# Altium PCB PCB_PCB_OPM MegaMod v0.3_2023-09-30.pcbdoc
Units mm, origin at the board's own origin, x right, y up, seen from the top; angles counter-clockwise.
Board outline 68.2 x 65.53 mm, 2 copper layers (Top Layer, Bottom Layer); 41 components, 52 nets, 176 pads, 16 vias.
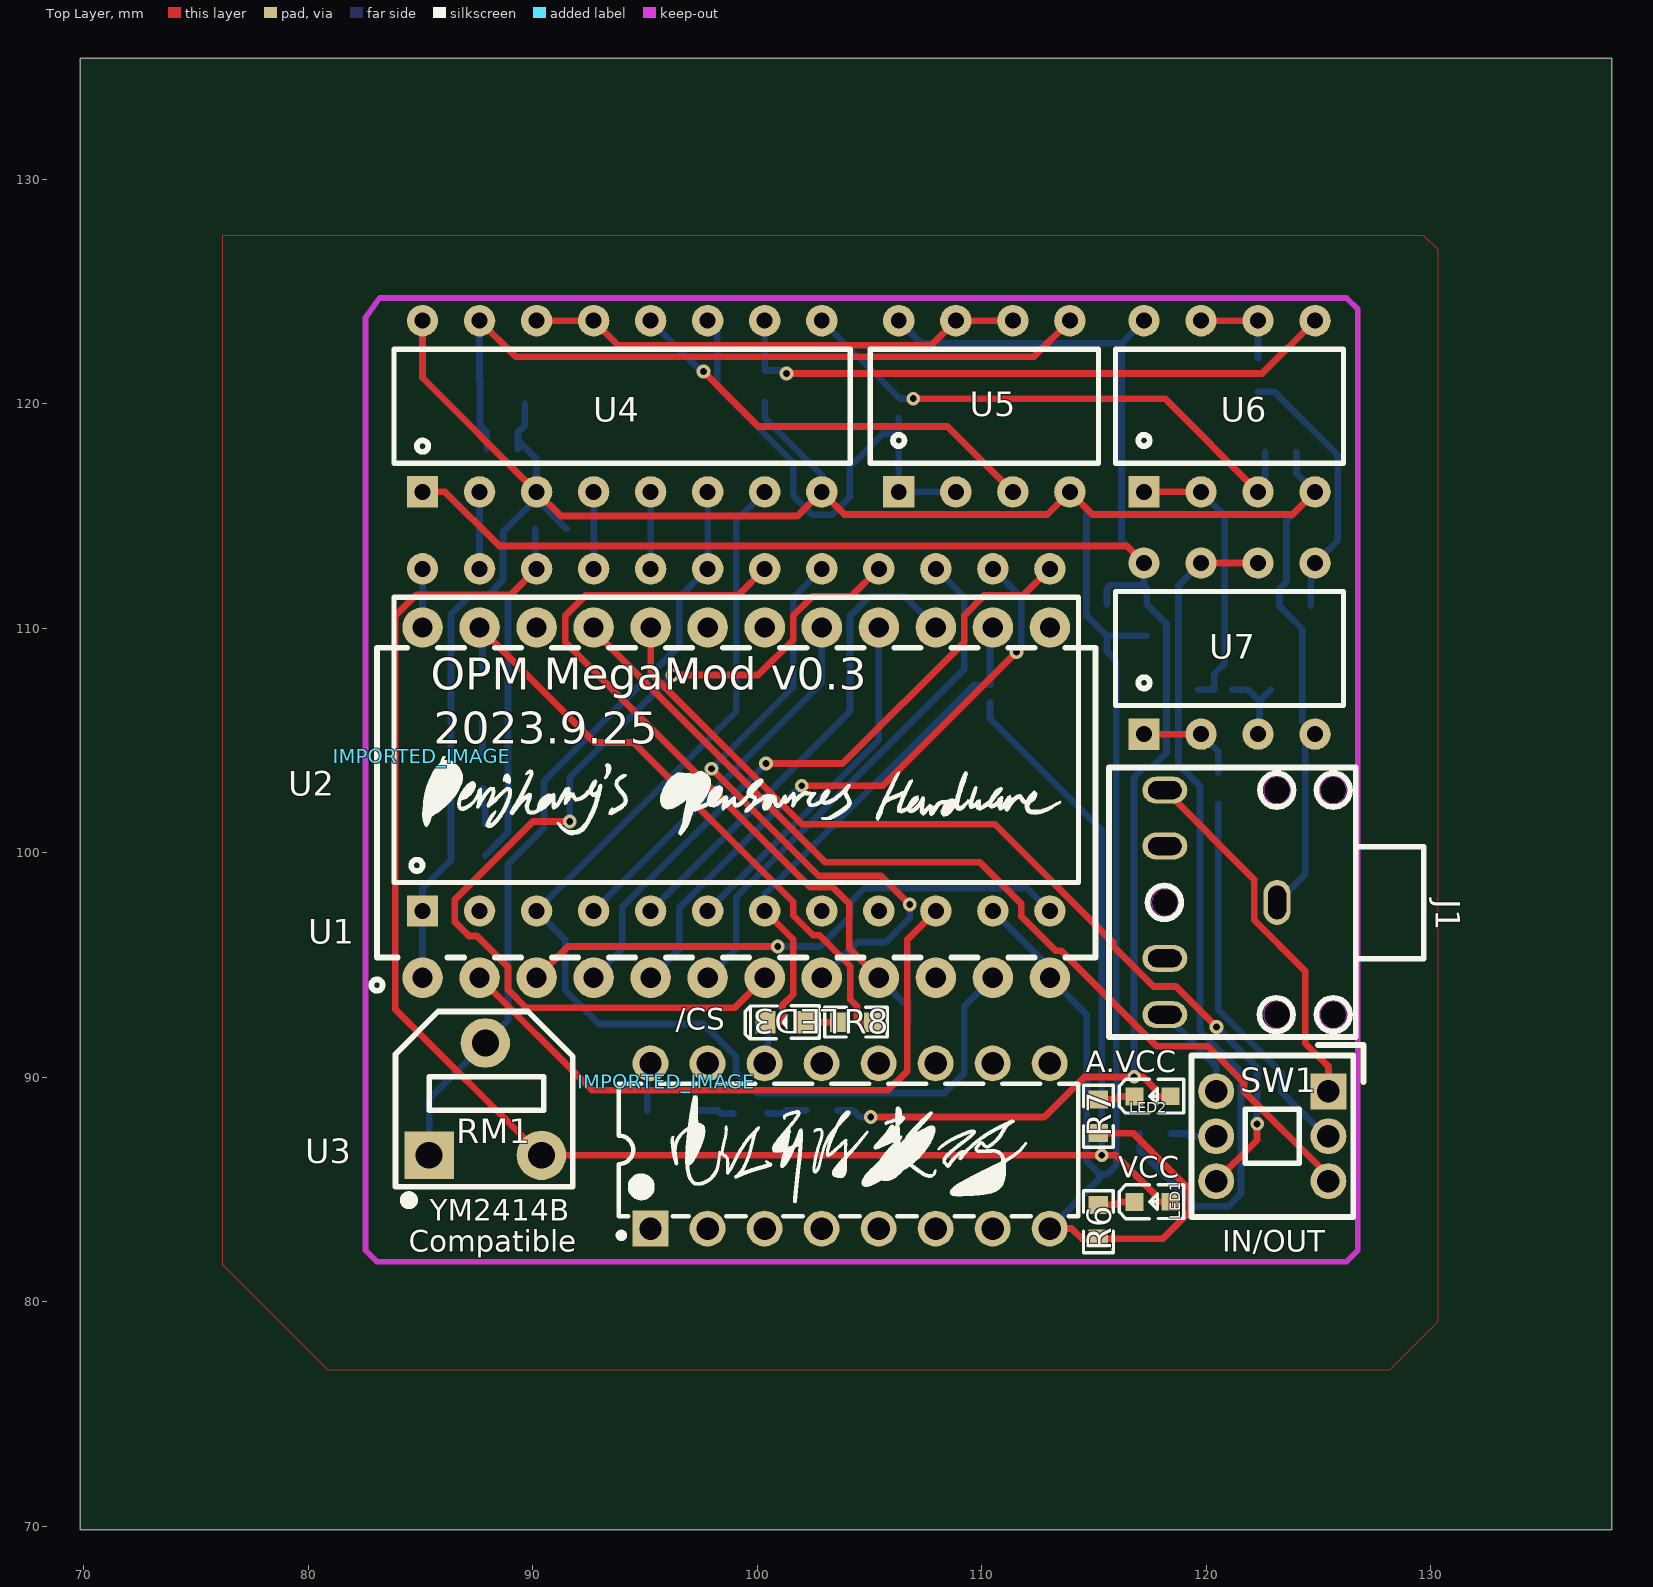
[diagram p0: Top Layer view]
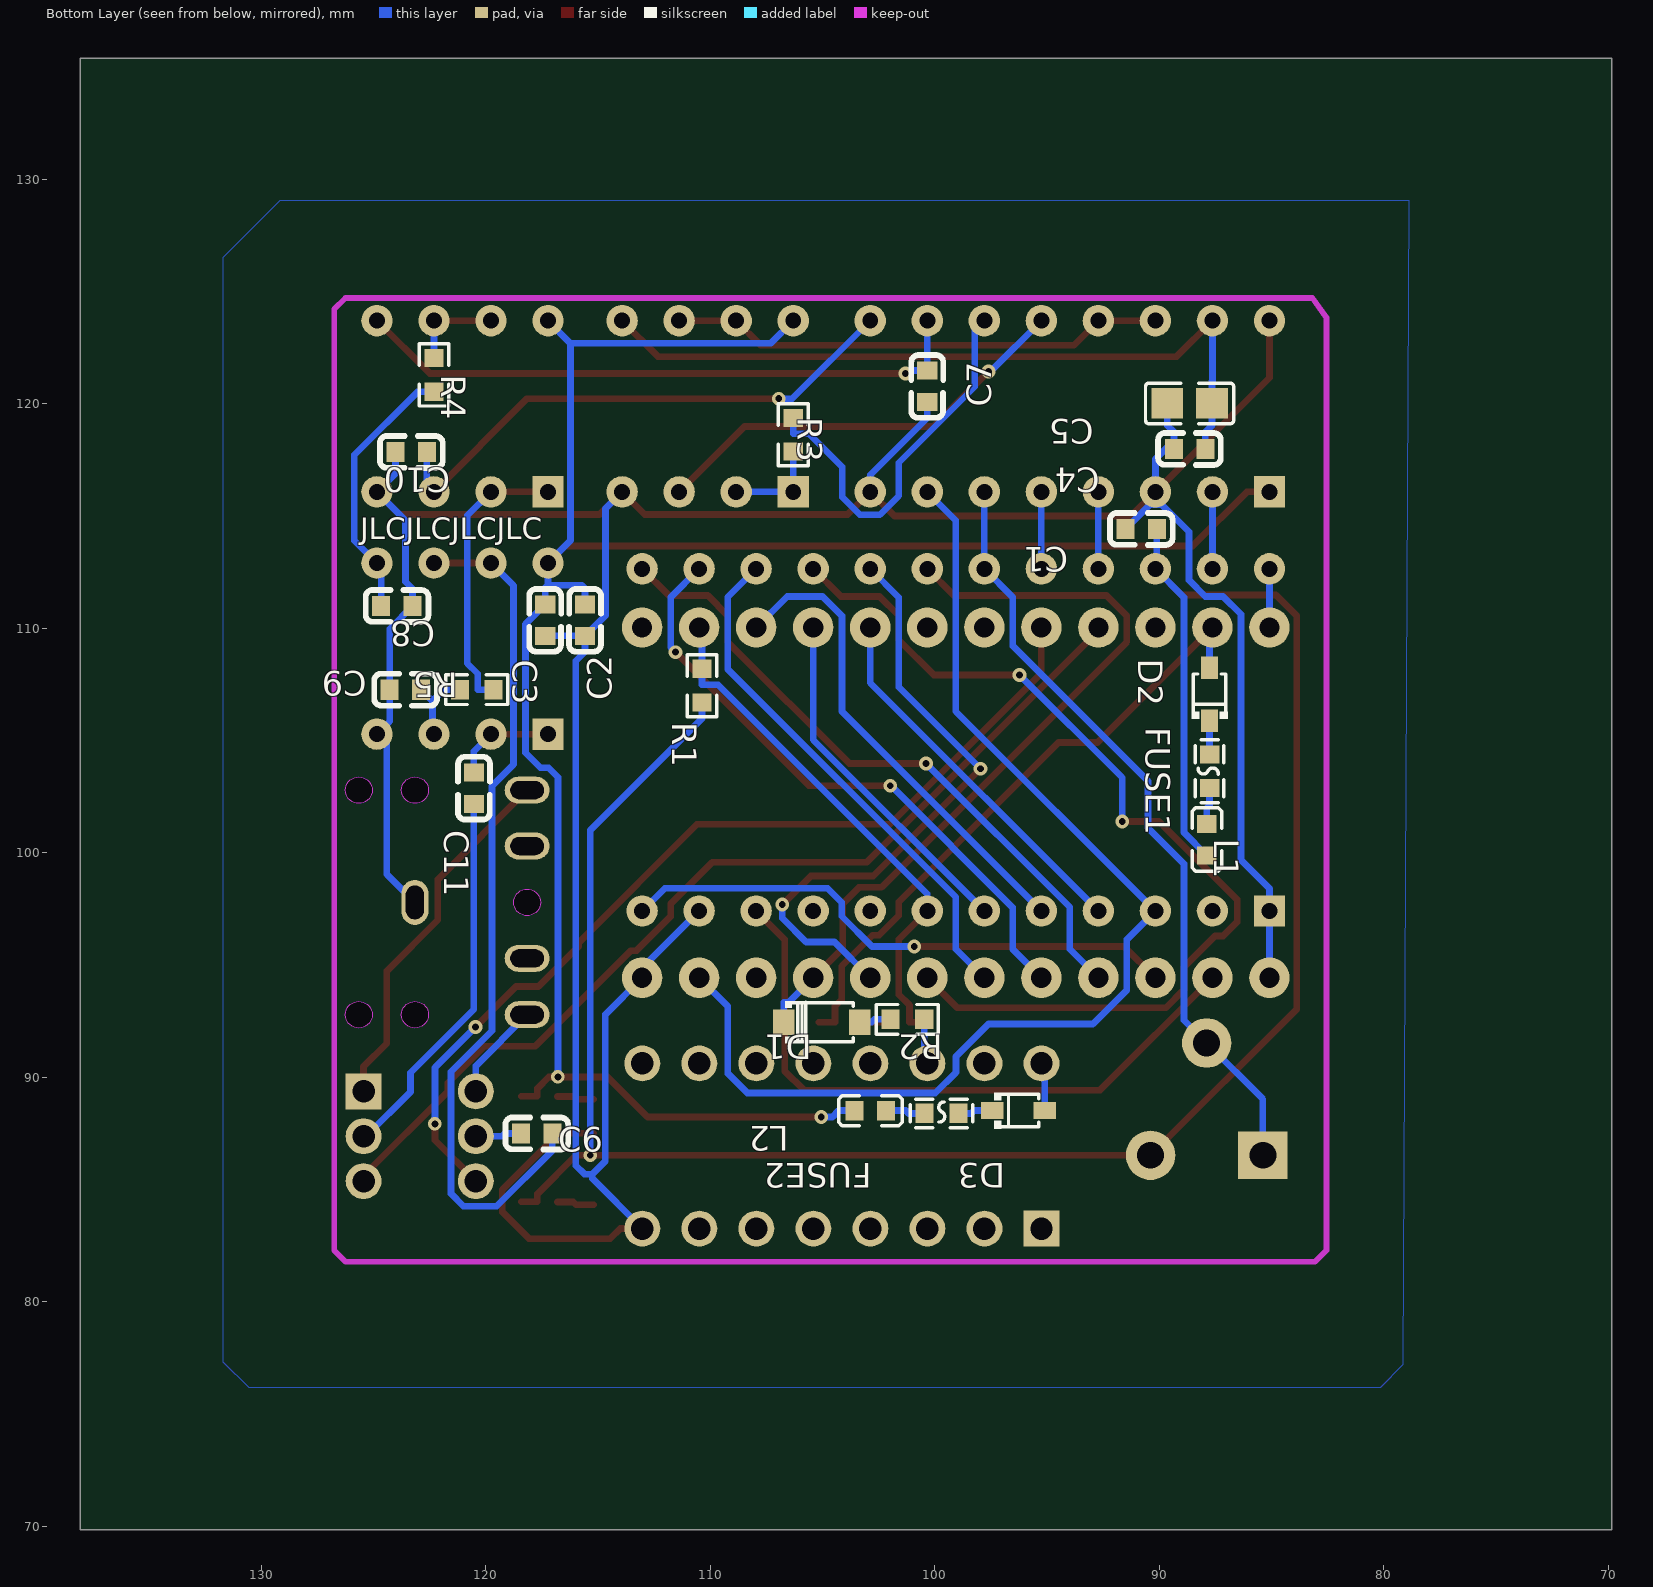
[diagram p1: Bottom Layer view, seen from below]

## Layer stack, top to bottom
Top Layer: signal copper (thickness not stored)
Dielectric: dielectric 0.32, FR-4, Dk 4.8
Bottom Layer: signal copper (thickness not stored)

## Board outline
138.049,69.85 69.85,69.85 69.85,135.382 138.049,135.382

## Components (designator, comment, footprint, x,y, rotation, side; value= is the part's Value field where it differs from the comment)
C1 "0.1u" C0603 90.805,114.427 r0 bottom
C2 "0.1u" C0603 115.57,110.363 r90 bottom
C3 "0.1u" C0603 117.348,110.363 r90 bottom
C4 "0.1u" C0603 88.646,117.983 r180 bottom
C5 "20u" C0805 88.646,120.015 r0 bottom
C6 "4.7u" C0603 117.729,87.503 r0 bottom
C7 "1.8n" C0603 100.33,120.777 r90 bottom
C8 "10n" C0603 123.952,110.998 r0 bottom
C9 "10n" C0603 123.571,107.264 r0 bottom
C10 "1.8n" C0603 123.317,117.856 r0 bottom
C11 "4.7u" C0603 120.523,102.87 r270 bottom
D1 "1N4148W" SOD-123_L2.8-W1.8-LS3.7-RD 105.029,92.456 r180 bottom
D2 "1N5819WS" SOD-323_L1.8-W1.3-LS2.5-RD 87.757,107.061 r90 bottom
D3 "1N5819WS" SOD-323_L1.8-W1.3-LS2.5-RD 96.266,88.519 r180 bottom
FUSE1 "PPTC0.5A/24V 自恢复保险丝-0603" F0603 87.757,103.632 r270 bottom
FUSE2 "PPTC0.5A/24V 自恢复保险丝-0603" F0603 99.695,88.392 r0 bottom
IMPORTED_IMAGE "IMPORTED_IMAGE" IMPORTED_IMAGE 95.974,89.794 r0 top
IMPORTED_IMAGE "IMPORTED_IMAGE" IMPORTED_IMAGE 85.085,104.295 r0 top
J1 "PJ-307C" AUDIO-TH_PJ307C 120.65,97.79 r270 top
L1 "100Ω" L0603 87.884,100.584 r270 bottom
L2 "100Ω" L0603 102.87,88.519 r0 bottom
LED1 "LED0603" LED0603-RD 117.602,84.455 r0 top
LED2 "LED0603" LED0603-RD 117.602,89.154 r0 top
LED3 "LED-0603_R" LED0603_RED 101.219,92.456 r180 top
R1 "62k" R0603 110.363,107.442 r270 bottom
R2 "1k" R0603 101.219,92.583 r0 bottom
R3 "100" R0603 106.299,118.618 r270 bottom
R4 "3.6k" R0603 122.301,121.285 r270 bottom
R5 "3.6k" R0603 120.396,107.264 r0 bottom
R6 "20k" R0603 115.189,83.566 r270 top
R7 "20k" R0603 115.189,88.265 r270 top
R8 "100r" R0603 104.394,92.456 r180 top
RM1 "5K" RES-ADJ-SMD_RM065-V1 87.884,89.027 r0 top
SW1 "XKB7070-Z" SW-TH_6P-L7.0-W7.0-P2.00 122.936,87.376 r0 top
U1 "YM2151" DIP24-600 99.06,105.029 r0 top
U2 "MegaGRRL IC-FM" DIP-24_L32.0-W13.8-P2.54-LS15.6-BL 99.06,102.235 r0 top
U3 "MegaGRRL IC-DCSG" DIP-16_L20.4-W5.8-P2.54-LS7.6-BL 104.132,86.941 r0 top
U4 "YM3012" DIP16 93.98,119.888 r0 top
U5 "SA5532AP" DIP8 110.109,119.888 r0 top
U6 "SA5532AP" DIP8 121.031,119.888 r0 top
U7 "SA5532AP" DIP8 121.031,109.093 r0 top

## Footprints (in the part's own frame and the unit in brackets; to place one, negate y for a bottom-side part, rotate by r counter-clockwise, add the part's x,y. Pads: shape width x height; smd on the part's side, far side on the other; paste and mask are expansions set on the pad)
AUDIO-TH_PJ307C [mm]
  oval 2x1.2 hole 0.8 slot 1.5 at 0 deg: 1(0,2.5)
  oval 1.2x2 hole 0.8 slot 1.5 at 90 deg: 2(5,-2.5) 3(2.489,-2.5) 4(-2.511,-2.5) 5(-5,-2.5)
  Multi-Layer board cut-out: -5,5.6 -5.298,5.518 -5.515,5.299 -5.595,5 -5.515,4.702 -5.298,4.483 -5,4.4 -5,4.4 -4.702,4.483 -4.485,4.702 -4.406,5 -4.485,5.299 -4.702,5.518 -5,5.6
  Multi-Layer board cut-out: 5,5.6 4.702,5.518 4.485,5.299 4.405,5 4.485,4.702 4.702,4.483 5,4.4 5,4.4 5.298,4.483 5.515,4.702 5.594,5 5.515,5.299 5.298,5.518 5,5.6
  Multi-Layer board cut-out: 5,3.1 4.702,3.018 4.485,2.799 4.405,2.5 4.485,2.202 4.702,1.982 5,1.9 5,1.9 5.298,1.983 5.515,2.202 5.594,2.5 5.515,2.799 5.298,3.018 5,3.1
  Multi-Layer board cut-out: -5,3.1 -5.298,3.018 -5.515,2.799 -5.595,2.5 -5.515,2.202 -5.298,1.982 -5,1.9 -5,1.9 -4.702,1.983 -4.485,2.202 -4.406,2.5 -4.485,2.799 -4.702,3.018 -5,3.1
  Multi-Layer board cut-out: 0,-1.9 -0.298,-1.982 -0.515,-2.201 -0.595,-2.5 -0.515,-2.798 -0.298,-3.018 0,-3.1 0,-3.1 0.298,-3.017 0.515,-2.798 0.594,-2.5 0.515,-2.201 0.298,-1.982 0,-1.9
  Multi-Layer keep-out region: -5,5.6 -5.298,5.518 -5.515,5.299 -5.595,5 -5.515,4.702 -5.298,4.483 -5,4.4 -5,4.4 -4.702,4.483 -4.485,4.702 -4.406,5 -4.485,5.299 -4.702,5.518 -5,5.6
  Multi-Layer keep-out region: 5,5.6 4.702,5.518 4.485,5.299 4.405,5 4.485,4.702 4.702,4.483 5,4.4 5,4.4 5.298,4.483 5.515,4.702 5.594,5 5.515,5.299 5.298,5.518 5,5.6
  Multi-Layer keep-out region: 5,3.1 4.702,3.018 4.485,2.799 4.405,2.5 4.485,2.202 4.702,1.982 5,1.9 5,1.9 5.298,1.983 5.515,2.202 5.594,2.5 5.515,2.799 5.298,3.018 5,3.1
  Multi-Layer keep-out region: -5,3.1 -5.298,3.018 -5.515,2.799 -5.595,2.5 -5.515,2.202 -5.298,1.982 -5,1.9 -5,1.9 -4.702,1.983 -4.485,2.202 -4.406,2.5 -4.485,2.799 -4.702,3.018 -5,3.1
  Multi-Layer keep-out region: 0,-1.9 -0.298,-1.982 -0.515,-2.201 -0.595,-2.5 -0.515,-2.798 -0.298,-3.018 0,-3.1 0,-3.1 0.298,-3.017 0.515,-2.798 0.594,-2.5 0.515,-2.201 0.298,-1.982 0,-1.9
  silkscreen extent -6.01,-4.99 5.99,9.03
C0603 [mm]
  rect 0.8x0.9 smd: 1(-0.7,0) 2(0.7,0)
  silkscreen extent -1.41,-0.71 1.39,0.72
C0805 [mm]
  rect 1.41x1.35 smd: 1(-1,0) 2(1,0)
  silkscreen extent -1.96,-0.9 1.96,0.9
DIP8 [mil]
  rect 55x55 hole 28: 1(-149.99,-150.01)
  round 55 hole 28: 2(-49.99,-150.01) 3(50.01,-150.01) 4(150.01,-150.01) 5(150.01,149.99) 6(50.01,149.99) 7(-49.99,149.99) 8(-149.99,149.99)
  silkscreen extent -200,-100 200,100
DIP16 [mil]
  rect 55x55 hole 28: 1(-350,-149.99)
  round 55 hole 28: 2(-250,-149.99) 3(-150,-149.99) 4(-50,-149.99) 5(50,-149.99) 6(150,-149.99) 7(250,-149.99) 8(350,-149.99) 9(350,150.01) 10(250,150.01) 11(150,150.01) 12(50,150.01) 13(-50,150.01) 14(-150,150.01) 15(-250,150.01) 16(-350,150.01)
  silkscreen extent -400,-100 400,100
DIP24-600 [mil]
  rect 55x55 hole 28: 1(-550,-300)
  round 55 hole 28: 2(-450,-300) 3(-350,-300) 4(-250,-300) 5(-150,-300) 6(-50,-300) 7(50,-300) 8(150,-300) 9(250,-300) 10(350,-300) 11(450,-300) 12(550,-300) 13(550,300) 14(450,300) 15(350,300) 16(250,300) 17(150,300) 18(50,300) 19(-50,300) 20(-150,300) 21(-250,300) 22(-350,300) 23(-450,300) 24(-550,300)
  silkscreen extent -600,-250 600,250
DIP-16_L20.4-W5.8-P2.54-LS7.6-BL [mm]
  rect 1.6x1.6 hole 1: 1(-8.89,-3.68)
  round 1.6 hole 1: 2(-6.35,-3.68) 3(-3.81,-3.68) 4(-1.27,-3.68) 5(1.27,-3.68) 6(3.81,-3.68) 7(6.35,-3.68) 8(8.89,-3.68) 9(8.89,3.68) 10(6.35,3.68) 11(3.81,3.68) 12(1.27,3.68) 13(-1.27,3.68) 14(-3.81,3.68) 15(-6.35,3.68) 16(-8.89,3.68)
  silkscreen extent -10.31,-4.1 10.16,2.77
DIP-24_L32.0-W13.8-P2.54-LS15.6-BL [mm]
  round 1.8 hole 0.9: 1(-13.97,-7.8) 2(-11.43,-7.8) 3(-8.89,-7.8) 4(-6.35,-7.8) 5(-3.81,-7.8) 6(-1.27,-7.8) 7(1.27,-7.8) 8(3.81,-7.8) 9(6.35,-7.8) 10(8.89,-7.8) 11(11.43,-7.8) 12(13.97,-7.8) 13(13.97,7.8) 14(11.43,7.8) 15(8.89,7.8) 16(6.35,7.8) 17(3.81,7.8) 18(1.27,7.8) 19(-1.27,7.8) 20(-3.81,7.8) 21(-6.35,7.8) 22(-8.89,7.8) 23(-11.43,7.8) 24(-13.97,7.8)
  silkscreen extent -16.26,-8.38 16,6.9
F0603 [mm]
  rect 0.806x0.864 smd: 1(-0.753,0) 2(0.753,0)
  silkscreen extent -1.4,-0.64 1.4,0.64
IMPORTED_IMAGE [mm]
  silkscreen extent 0,-5.4 16.31,0
L0603 [mm]
  rect 0.8x0.864 smd: 1(-0.7,0) 2(0.7,0)
  silkscreen extent -1.42,-0.65 1.41,0.67
LED0603-RD [mm]
  rect 0.8x0.8 smd: 1(-0.8,-0.003) 2(0.799,0.004)
  silkscreen extent -1.49,-0.75 1.39,0.76
LED0603_RED [mm]
  rect 0.9x1 smd: 1(-0.85,0) 2(0.85,0)
  silkscreen extent -1.54,-0.73 1.75,0.73
R0603 [mm]
  rect 0.806x0.864 smd: 1(-0.753,0) 2(0.753,0)
  silkscreen extent -1.39,-0.66 1.39,0.66
RES-ADJ-SMD_RM065-V1 [mm]
  rect 2.2x2.1 hole 1.199 copper offset 0,0: 1(-2.5,-2.5)
  round 2.2 hole 1.199: 2(0,2.5) 3(2.5,-2.499)
  silkscreen extent -4,-4.7 3.9,3.9
SOD-123_L2.8-W1.8-LS3.7-RD [mm]
  rect 0.95x1.15 smd: 1(-1.692,0) 2(1.692,0)
  silkscreen extent -1.63,-0.94 1.41,0.94
SOD-323_L1.8-W1.3-LS2.5-RD [mm]
  rect 1x0.75 smd: 1(-1.173,0) 2(1.173,0)
  silkscreen extent -1.08,-0.8 0.9,0.8
SW-TH_6P-L7.0-W7.0-P2.00 [mm]
  rect 1.6x1.6 hole 1: 1(2.5,2)
  round 1.6 hole 1: 2(2.5,0) 3(2.5,-2) 4(-2.5,2) 5(-2.5,0) 6(-2.5,-2)
  silkscreen extent -3.6,-3.6 4.06,4.06

## Via types
v1: diameter 0.61, hole 0.305, Top Layer to Bottom Layer, 16 vias

## Nets (pads, with @x,y where several pads share a name; then routed paths per layer and width w, separated by ;. In a path a pad name is that pad's centre, name@x,y a point inside that pad or via, vN(x,y) a via of type N, cw(c..) or ccw(c..) an arc to the next point about the centre after c; other vN are vias at no path point)
/CS: LED3.2 R1.1 U1.7 U2.14 | length 23.7
  Top Layer w0.3: U1.7 101.6,96.139 101.6,93.687 101.126,93.212 101.126,92.456 LED3.2
  Bottom Layer w0.3: U1.7 100.33,98.162 109.653,107.486 110.363,107.486 R1.1 110.363,109.908 U2.14
/IC: U1.3 U2.11 U4.7 | length 52.2
  Bottom Layer w0.3: U4.7 99.06,114.808 99.06,106.299 U1.3 91.44,96.139 91.44,93.89 92.957,92.374 97.603,92.374 99.053,90.924 99.053,90.221 99.975,89.299 108.343,89.299 109.213,90.169 109.213,93.158 U2.11
/RD: U1.6 U2.16 | length 15.8
  Bottom Layer w0.3: U1.6 105.41,105.029 U2.16
/WR: U1.5 U2.15 | length 21.6
  Bottom Layer w0.3: U1.5 104.131,106.29 104.131,110.552 104.997,111.419 106.567,111.419 U2.15
A0: U1.4 U2.17 | length 16.8
  Bottom Layer w0.3: U1.4 102.87,107.569 U2.17
A.VCC: C2.2 C3.2 L2.2 LED2.2 U4.1 U5.8 U6.8 U7.8 | length 98.2
  Top Layer w0.3: U4.1 86.095,116.078 88.509,113.663 116.461,113.663 U7.8 ; v1(105.055,88.237) 112.783,88.237 114.565,90.019 v1(116.781,90.019) 117.186,90.019 117.695,89.511 117.695,89.158 LED2.2
  Bottom Layer w0.3: L2.2 104.276,88.519 104.558,88.237 v1(105.055,88.237) ; U5.8 107.305,122.692 116.215,122.692 ; C2.2 115.57,111.769 115.72,111.919 117.221,111.919 ; v1(116.781,90.019) 116.781,103.364 117.202,103.786 117.556,103.786 118.227,104.457 118.227,110.184 C3.2 117.348,111.792 117.221,111.919 ; U6.8 116.215,122.692 ; 116.215,122.692 116.215,113.909 U7.8 117.221,111.919
A.VCC_IN: D3.2 U3.16 | length 2.2
  Bottom Layer w0.3: D3.2 95.093,90.472 U3.16
BC: U4.13 U4.14 U5.6 U5.7 | length 22.1
  Top Layer w0.3: U4.14 U4.13 93.805,122.602 107.743,122.602 U5.7 U5.6
C6_2: C6.2 SW1.5 | length 2.1
  Bottom Layer w0.3: C6.2 119.135,87.503 119.262,87.376 SW1.5
C11_2: C11.2 SW1.2 | length 16.9
  Bottom Layer w0.3: C11.2 120.523,93.033 123.351,90.205 123.351,89.351 125.326,87.376 SW1.2
CH1: C10.1 U4.9 U6.3 | length 24.5
  Top Layer w0.3: v1(106.942,120.226) 118.153,120.226 U6.3
  Bottom Layer w0.3: U4.9 106.342,120.226 v1(106.942,120.226) ; U6.3 122.617,116.394 C10.1
CH2: C7.2 U4.10 U6.5 | length 27.8
  Top Layer w0.3: v1(101.297,121.343) 122.486,121.343 U6.5
  Bottom Layer w0.3: U4.10 C7.2 101.163,121.477 v1(101.297,121.343)
COM: R3.1 U4.11 | length 17.4
  Bottom Layer w0.3: U4.11 98.213,123.274 98.213,120.758 101.6,117.372 101.6,115.898 102.441,115.057 103.323,115.057 104.115,115.849 104.115,117.188 105.589,118.662 106.299,118.662 R3.1
D0: U1.10 U2.2 | length 29.1
  Top Layer w0.3: U2.2 92.638,89.428 105.824,89.428 106.68,90.284 106.68,96.139 U1.10
D1: U1.12 U2.3 | length 25.3
  Top Layer w0.3: U2.3 91.562,95.827 v1(100.911,95.827)
  Bottom Layer w0.3: v1(100.911,95.827) 102.792,95.827 104.14,97.176 104.14,97.794 104.762,98.416 112.024,98.416 U1.12
D2: U1.13 U2.4 | length 29.6
  Top Layer w0.3: v1(100.383,103.978) 103.801,103.978 109.22,109.396 109.22,110.573 110.104,111.457 111.838,111.457 U1.13
  Bottom Layer w0.3: U2.4 93.98,95.705 93.98,97.575 v1(100.383,103.978)
D3: U1.14 U2.5 | length 27.7
  Top Layer w0.3: v1(101.975,102.989) 105.598,102.989 v1(111.547,108.938)
  Bottom Layer w0.3: U2.5 96.526,95.711 96.526,97.569 101.946,102.989 v1(101.975,102.989) ; U1.14 111.76,111.379 111.76,109.151 v1(111.547,108.938)
D4: U1.15 U2.6 | length 23.5
  Bottom Layer w0.3: U2.6 99.059,95.704 99.059,98.02 109.219,108.18 109.219,111.38 U1.15
D5: U1.16 U2.7 | length 44.3
  Top Layer w0.3: v1(91.647,101.394) 90.007,101.394 86.53,97.916 86.53,96.917 87.15,96.297 87.514,96.297 88.9,94.912 88.9,93.905 89.709,93.096 98.991,93.096 U2.7 ; v1(96.221,107.919) 100.039,107.919 101.6,109.48 101.6,110.561 102.457,111.419 104.179,111.419 U1.16
  Bottom Layer w0.3: v1(91.647,101.394) 91.647,103.345 v1(96.221,107.919)
D6: U1.17 U2.8 | length 27.9
  Top Layer w0.3: v1(97.959,103.744) 102.737,98.967 105.517,98.967 v1(106.786,97.698)
  Bottom Layer w0.3: v1(97.959,103.744) 101.6,107.385 101.6,111.379 U1.17 ; U2.8 104.457,96.022 105.722,96.022 106.786,97.086 v1(106.786,97.698)
D7: D1.1 U1.18 U2.9 | length 34.9
  Top Layer w0.3: U1.18 99.138,111.457 92.349,111.457 91.44,110.549 91.44,109.397 102.377,98.461 103.373,98.461 104.091,97.742 104.091,95.754 U2.9
  Bottom Layer w0.3: U2.9 106.508,93.337 106.721,93.337 D1.1
FUSE1_1: D2.1 FUSE1.1 | length 1.5
  Bottom Layer w0.3: FUSE1.1 D2.1
FUSE1_2: FUSE1.2 L1.1 | length 1.6
  Bottom Layer w0.3: FUSE1.2 87.757,102.117 87.884,101.99 L1.1
FUSE2_1: D3.1 FUSE2.1 | length 1.6
  Bottom Layer w0.3: D3.1 98.245,88.519 98.372,88.392 FUSE2.1
FUSE2_2: FUSE2.2 L2.1 | length 1.8
  Bottom Layer w0.3: FUSE2.2 101.158,88.392 101.285,88.519 L2.1
GND: C1.2 C2.1 C3.1 C4.1 C5.2 C7.1 C8.1 C9.2 C10.2 J1.1 R6.2 R7.2 U1.1 U1.11 U2.1 U2.12 U3.8 U4.3 U4.8 U4.16 U5.4 U6.4 U7.4 | length 169
  Top Layer w0.3: U4.16 85.09,121.158 U4.3 91.249,114.999 101.791,114.999 U4.8 103.876,115.072 112.913,115.072 U5.4 114.925,115.072 123.835,115.072 U6.4 ; U3.8 114.002,83.262 114.451,82.813 R6.2 118.064,82.813 119.255,84.004 119.255,84.996 116.739,87.512 R7.2
  Bottom Layer w0.3: U2.1 U1.1 85.09,98.414 86.36,99.684 86.36,110.624 87.155,111.419 87.95,111.419 88.672,112.141 88.672,114.299 89.889,115.516 U4.3@90.17,115.516 ; C4.1 C4.1@89.346,118.361 ; C5.2 89.646,119.034 89.64,119.034 89.346,118.74 C4.1@89.346,118.361 ; C1.2 90.416,115.516 U4.3@90.17,115.516 ; C7.1 100.33,119.371 102.87,116.831 U4.8 ; U1.11 113.03,94.869 U2.12 114.67,92.795 114.67,86.264 115.247,85.687 ; U3.8 115.247,85.486 115.247,85.687 ; U5.4 114.665,115.332 114.665,110.568 C2.1 ; C3.1 116.592,109.663 C2.1 ; J1.1 124.4,99.04 124.4,104.842 U7.4 124.271,105.853 C9.2 124.271,109.979 C8.1 123.252,111.754 123.571,112.073 123.571,114.808 U6.4 124.017,116.902 C10.2 ; C4.1@89.346,118.361 90.17,117.537 U4.3 U4.3@90.17,115.516 ; 115.247,85.687 115.596,85.687 115.986,86.078 115.986,108.54 115.57,108.957 C2.1
IN.L: SW1.3 U2.21 | length 43.7
  Top Layer w0.3: U2.21 92.71,109.898 103.034,99.574 109.91,99.574 111.76,97.724 111.76,97.16 113.277,95.643 113.53,95.643 117.784,91.389 120.048,91.389 121.678,89.758 121.678,89.374 125.436,85.617 SW1.3
IN.R: SW1.6 U2.20 | length 42.2
  Top Layer w0.3: U2.20 95.25,108.015 101.992,101.273 110.59,101.273 115.85,96.013 115.85,95.846 117.651,94.045 118.643,94.045 v1(120.447,92.242) ; SW1.6 122.259,87.199 v1(122.259,87.927)
  Bottom Layer w0.3: v1(120.447,92.242) 122.259,90.43 v1(122.259,87.927)
LED1_1: LED1.1 R6.1 | length 1.7
  Top Layer w0.3: R6.1 115.964,84.319 116.096,84.452 LED1.1
MCLK: U1.24 U2.24 | length 2.6
  Bottom Layer w0.3: U2.24 U1.24
OUT.L: J1.5 SW1.1 | length 16.4
  Top Layer w0.3: J1.5@118.15,102.79 122.128,98.812 122.128,97.016 124.4,94.744 124.4,91.518 125.436,90.482 SW1.1
OUT.R: J1.2 SW1.4 | length 4.4
  Bottom Layer w0.3: J1.2@118.15,92.79 120.436,90.504 SW1.4
PHI1: U1.23 U4.2 | length 3.4
  Bottom Layer w0.3: U1.23 U4.2
R2_1: R2.1 U3.14 | length 2
  Bottom Layer w0.3: U3.14 100.466,90.765 R2.1
R2_2: D1.2 R2.2 | length 1.4
  Bottom Layer w0.3: R2.2 102.682,92.583 102.809,92.456 D1.2
R7_1: LED2.1 R7.1 | length 1.7
  Top Layer w0.3: R7.1 115.964,89.018 116.096,89.151 LED2.1
R8_2: LED3.1 R8.2 | length 1.6
  Top Layer w0.3: LED3.1 R8.2
RB: C4.2 C5.1 U4.15 U5.5 | length 33.5
  Top Layer w0.3: U4.15 89.23,122.097 112.319,122.097 U5.5
  Bottom Layer w0.3: U4.15 87.63,121.013 87.646,120.997 C5.1 87.646,119.034 87.652,119.034 87.946,118.74 C4.2
SH1: U1.20 U4.5 | length 3.4
  Bottom Layer w0.3: U1.20 U4.5
SH2: RM1.1 RM1.2 U1.19 U4.6 | length 34.7
  Bottom Layer w0.3: RM1.1 85.384,89.027 RM1.2 88.9,92.543 88.9,99.508 90.497,101.105 90.497,103.19 96.52,109.213 96.52,111.379 U1.19 U4.6
SO: U1.21 U4.4 | length 3.4
  Bottom Layer w0.3: U1.21 U4.4
TOBUF: U4.12 U5.3 | length 19.3
  Top Layer w0.3: v1(97.601,121.433) 100.047,118.986 108.471,118.986 U5.3
  Bottom Layer w0.3: U4.12 97.515,121.433 v1(97.601,121.433)
U5_1: R3.2 U5.1 U5.2 | length 4.3
  Bottom Layer w0.3: R3.2 U5.1 U5.2
U6_1: R5.1 U6.1 U6.2 | length 12.7
  Top Layer w0.3: U6.1 U6.2
  Bottom Layer w0.3: R5.1 120.352,107.264 120.352,107.974 120.817,108.438 120.817,115.022 U6.2
U6_6: R4.1 U6.6 U6.7 | length 4.2
  Top Layer w0.3: U6.7 U6.6
  Bottom Layer w0.3: R4.1 U6.6
U7_1: C11.1 U7.1 U7.2 | length 4.6
  Top Layer w0.3: U7.1 U7.2
  Bottom Layer w0.3: U7.2 120.523,104.521 C11.1
U7_3: C9.1 R5.2 U7.3 | length 3.6
  Bottom Layer w0.3: R5.2 121.859,107.264 122.365,106.758 ; U7.3 122.365,105.347 122.365,106.758 ; C9.1 122.365,106.758
U7_5: C8.2 R4.2 U7.5 | length 11.9
  Bottom Layer w0.3: R4.2 123.039,120.532 125.851,117.72 125.851,113.913 U7.5 124.652,112.714 C8.2
U7_6: C6.1 U7.6 U7.7 | length 38.7
  Top Layer w0.3: U7.7 U7.6
  Bottom Layer w0.3: C6.1 117.029,86.747 119.516,84.259 120.986,84.259 121.544,84.817 121.544,90.249 119.721,92.073 119.721,102.974 118.755,103.94 118.755,111.897 U7.7
VCC: C1.1 L1.2 LED1.2 R1.2 RM1.3 U1.22 | length 100.7
  Top Layer w0.3: U1.22 89.005,111.485 84.806,111.485 83.872,110.55 83.872,93.04 RM1.3 v1(115.343,86.528) 115.978,86.528 117.695,84.812 117.695,84.459 LED1.2
  Bottom Layer w0.3: L1.2 88.9,100.9 88.9,111.379 U1.22 90.105,112.714 C1.1 ; R1.2 110.363,105.979 115.343,100.999 v1(115.343,86.528)
VCC_IN: D2.2 R8.1 U2.23 | length 28.3
  Top Layer w0.3: U2.23 92.749,104.916 94.49,104.916 101.6,97.806 101.6,97.201 102.469,96.332 102.759,96.332 104.14,94.951 104.14,93.463 104.438,93.166 104.438,92.456 R8.1
  Bottom Layer w0.3: U2.23 87.757,109.908 D2.2
"": J1.3 J1.4 U1.2 U1.8 U1.9 U2.10 U2.13 U2.18 U2.19 U2.22 U3.1 U3.2 U3.3 U3.4 U3.5 U3.6 U3.7 U3.9 U3.10 U3.11 U3.12 U3.13 U3.15

## Polygon pours and split planes (outlines as drawn)
GND on Top Layer (solid, remove dead copper, pour order 0): 76.2,127.508 129.667,127.508 130.302,126.873 130.302,79.121 128.143,76.962 80.899,76.962 76.2,81.661
GND on Bottom Layer (solid, remove dead copper, pour order 1): 78.867,129.032 129.159,129.032 131.699,126.492 131.699,77.343 130.556,76.2 80.137,76.2 79.121,77.216

## Keep-outs
Board Outline Layer:
  lines w0.254 net "": 125.997,81.788 126.238,81.788 ; 126.238,81.788 83.058,81.788 82.55,82.296 82.55,82.423 82.55,123.571 82.55,123.825 83.185,124.714 126.238,124.714 126.746,124.206 126.746,115.697 126.746,82.804 126.746,82.296 126.238,81.788

## Silkscreen, mask and mechanical layers (free items; w line width, h text height)
Top Silkscreen Layer:
  text "OPM MegaMod v0.3" at 85.462,107.269 h1.44
  text "2023.9.25" at 85.583,104.856 h1.44
  text "/CS" at 96.367,92.129 h0.96
  text "A.VCC" at 114.632,90.224 h0.96
  text "VCC" at 116.075,85.525 h0.96
  text "YM2414B" at 85.399,83.62 h0.96
  text "Compatible" at 84.476,82.223 h0.96
  text "IN/OUT" at 120.717,82.223 h0.96
Bottom Silkscreen Layer:
  text "JLCJLCJLCJLC" at 125.574,113.973 h0.96